# Altium PCB 2019-NUC029LAN.PcbDoc (part 2 of 2)
Units mil, origin at the board's own origin, x right, y up, seen from the top; angles counter-clockwise.
Board outline 3307.03 x 3019.03 mil, 2 copper layers (Top Layer, Bottom Layer); 66 components, 62 nets, 308 pads, 91 vias.
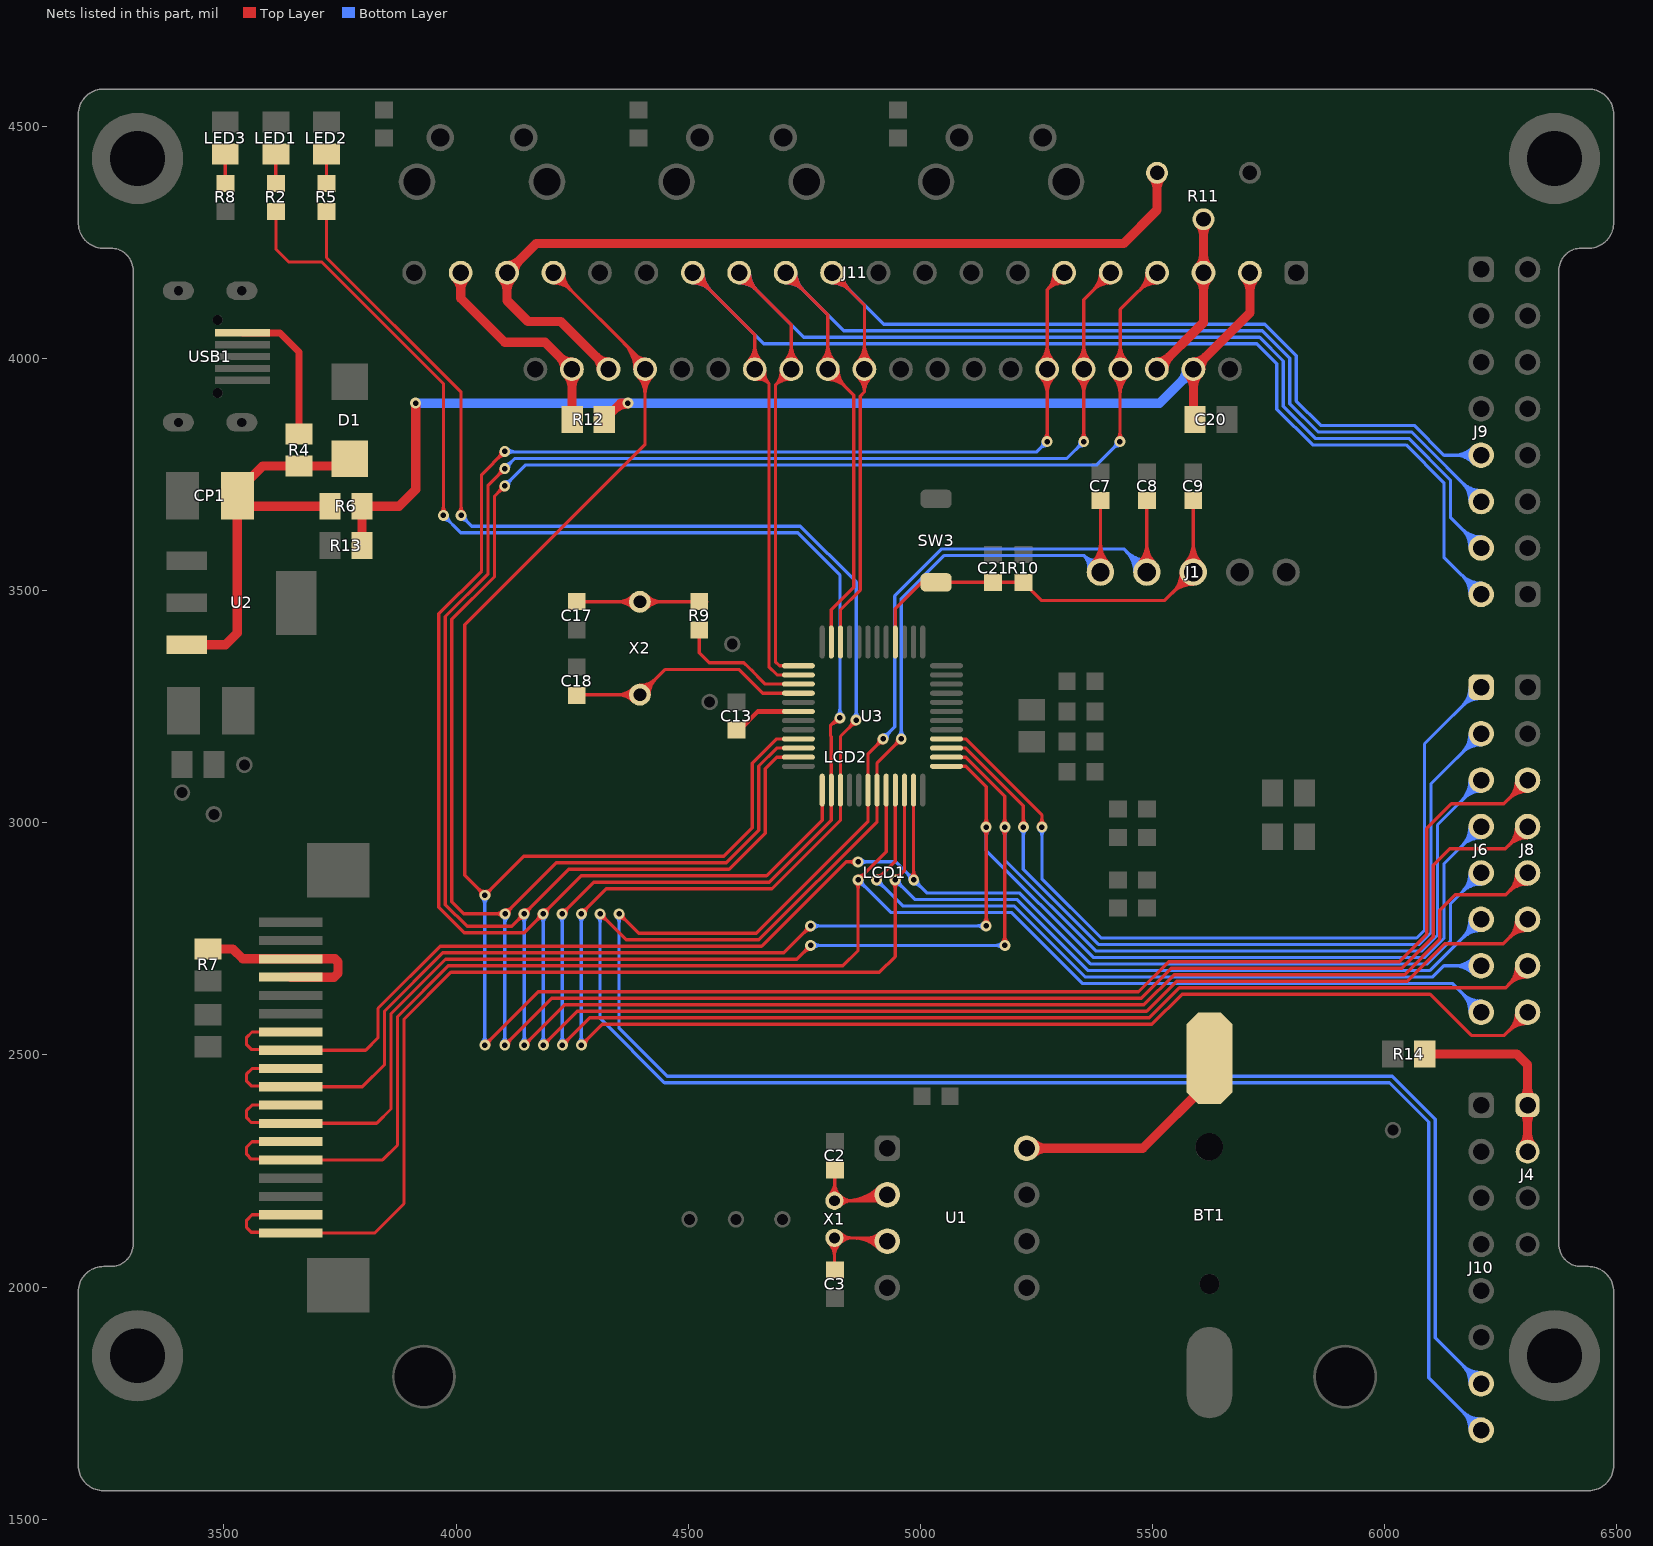
[diagram p2: the nets of this part, all layers, seen from the top]

## Via types
v1: diameter 23.62, hole 11.81, Top Layer to Bottom Layer, 91 vias

## Nets (pads, with @x,y where several pads share a name; then routed paths per layer and width w, separated by ;. In a path a pad name is that pad's centre, name@x,y a point inside that pad or via, vN(x,y) a via of type N, cw(c..) or ccw(c..) an arc to the next point about the centre after c; other vN are vias at no path point) (continued)
LCD-DB4: J9.5 J11.11 LCD1.11 U3.10 | length 3166.3
  Top Layer w7: J11.11@4810,4162.91 cw(c4810,4109.58) 4847.71,4147.29 cw(c4885.42,4185) J11.11@4832.09,4185 ; J11.11@4810,4169.91 cw(c4810,4133.48) 4835.76,4159.24 cw(c4861.52,4185) J11.11@4825.09,4185 ; J11.11@4810,4185 4879.64,4115.36 LCD1.11@4879.64,3977 4879.64,3928 ; U3.10@4828.1,3389.45 4828.1,3458.97 4870.53,3501.4 4870.53,3918.89 4879.64,3928 ; LCD1.11@4864.02,3992.62 ccw(c4826.31,4030.33) 4879.64,4030.33 ccw(c4932.97,4030.33) LCD1.11@4895.26,3992.62 ; LCD1.11@4865.01,3960.45 cw(c4836.34,3928) 4879.64,3928 ; LCD1.11@4868.97,3987.67 ccw(c4843.21,4013.43) 4879.64,4013.43 ccw(c4916.07,4013.43) LCD1.11@4890.31,3987.67 ; LCD1.11@4869.65,3965.69 cw(c4850.06,3943.53) 4879.64,3943.53 cw(c4909.21,3943.53) LCD1.11@4889.63,3965.69 ; LCD1.11@4894.27,3960.45 ccw(c4922.93,3928) 4879.64,3928
  Bottom Layer w7: J11.11@4810,4162.91 cw(c4810,4109.58) 4847.71,4147.29 cw(c4885.42,4185) J11.11@4832.09,4185 ; J11.11@4810,4169.91 cw(c4810,4133.48) 4835.76,4159.24 cw(c4861.52,4185) J11.11@4825.09,4185 ; J11.11@4810,4185 4921,4074 5742.4,4074 5810,4006.4 5810,3908.4 5862.4,3856 6063.8,3856 6127.8,3792 J9.5@6208,3792 ; J9.5@6190.99,3774.99 ccw(c6149.92,3733.92) 6149.92,3792 ccw(c6149.92,3850.08) J9.5@6190.99,3809.01 ; J9.5@6195.94,3779.94 ccw(c6166.82,3750.82) 6166.82,3792 ccw(c6166.82,3833.18) J9.5@6195.94,3804.06
LCD-DB5: J9.6 J11.12 LCD1.12 U3.11 | length 3355.7
  Top Layer w7: J11.12@4710,4162.91 cw(c4710,4109.58) 4747.71,4147.29 cw(c4785.42,4185) J11.12@4732.09,4185 ; J11.12@4710,4169.91 cw(c4710,4133.48) 4735.76,4159.24 cw(c4761.52,4185) J11.12@4725.09,4185 ; J11.12@4710,4185 4800.9,4094.1 LCD1.12@4800.9,3977 4856.53,3921.37 4856.53,3507.2 4808.42,3459.09 U3.11@4808.42,3389.45 ; LCD1.12@4785.28,3992.62 ccw(c4747.57,4030.33) 4800.9,4030.33 ccw(c4854.23,4030.33) LCD1.12@4816.52,3992.62 ; LCD1.12@4790.23,3987.67 ccw(c4764.47,4013.43) 4800.9,4013.43 ccw(c4837.33,4013.43) LCD1.12@4811.57,3987.67 ; LCD1.12@4800.9,3954.91 cw(c4800.9,3901.58) 4838.61,3939.29 cw(c4876.32,3977) LCD1.12@4822.99,3977 ; LCD1.12@4800.9,3961.91 cw(c4800.9,3925.48) 4826.66,3951.24 cw(c4852.42,3977) LCD1.12@4815.99,3977
  Bottom Layer w7: J11.12@4710,4162.91 cw(c4710,4109.58) 4747.71,4147.29 cw(c4785.42,4185) J11.12@4732.09,4185 ; J11.12@4710,4169.91 cw(c4710,4133.48) 4735.76,4159.24 cw(c4761.52,4185) J11.12@4725.09,4185 ; J11.12@4710,4185 4835,4060 5736.6,4060 5796,4000.6 5796,3902.6 5856.6,3842 6058,3842 J9.6@6208,3692 ; J9.6@6183.94,3692 ccw(c6125.86,3692) 6166.93,3733.07 ccw(c6208,3774.14) J9.6@6208,3716.06 ; J9.6@6190.94,3692 ccw(c6149.76,3692) 6178.88,3721.12 ccw(c6208,3750.24) J9.6@6208,3709.06
LCD-DB6: J9.7 J11.13 LCD1.13 U3.13 | length 3599.4
  Top Layer w7: J11.13@4610,4162.91 cw(c4610,4109.58) 4647.71,4147.29 cw(c4685.42,4185) J11.13@4632.09,4185 ; J11.13@4610,4169.91 cw(c4610,4133.48) 4635.76,4159.24 cw(c4661.52,4185) J11.13@4625.09,4185 ; J11.13@4610,4185 4722.17,4072.83 LCD1.13@4722.17,3977 4688,3942.83 ; LCD1.13@4700.13,3975.4 cw(c4658.45,3972.39) 4688,3942.84 ; LCD1.13@4706.55,3992.62 ccw(c4668.83,4030.33) 4722.17,4030.33 ccw(c4775.5,4030.33) LCD1.13@4737.79,3992.62 ; LCD1.13@4707.11,3975.91 cw(c4678.64,3973.85) 4698.83,3953.66 cw(c4719.01,3933.47) LCD1.13@4721.08,3961.95 ; LCD1.13@4711.5,3987.67 ccw(c4685.73,4013.43) 4722.17,4013.43 ccw(c4758.6,4013.43) LCD1.13@4732.84,3987.67 ; LCD1.13@4720.57,3954.97 ccw(c4717.55,3913.28) 4688,3942.84 ; U3.13@4737.55,3338.27 4696.73,3338.27 4688,3347 4688,3942.83
  Bottom Layer w7: J11.13@4610,4162.91 cw(c4610,4109.58) 4647.71,4147.29 cw(c4685.42,4185) J11.13@4632.09,4185 ; J11.13@4610,4169.91 cw(c4610,4133.48) 4635.76,4159.24 cw(c4661.52,4185) J11.13@4625.09,4185 ; J11.13@4610,4185 4749,4046 5730.8,4046 5782,3994.8 5782,3896.8 5850.8,3828 6052.2,3828 6141.79,3738.41 6141.79,3658.21 J9.7@6208,3592 ; J9.7@6183.94,3592 ccw(c6125.86,3592) 6166.93,3633.07 ccw(c6208,3674.14) J9.7@6208,3616.06 ; J9.7@6190.94,3592 ccw(c6149.76,3592) 6178.88,3621.12 ccw(c6208,3650.24) J9.7@6208,3609.06
LCD-DB7: J9.8 J11.14 LCD1.14 U3.14 | length 3802.5
  Top Layer w7: J11.14@4510,4162.91 cw(c4510,4109.58) 4547.71,4147.29 cw(c4585.42,4185) J11.14@4532.09,4185 ; J11.14@4510,4169.91 cw(c4510,4133.48) 4535.76,4159.24 cw(c4561.52,4185) J11.14@4525.09,4185 ; J11.14@4510,4185 4643.43,4051.57 LCD1.14@4643.43,3977 4674,3946.43 ; LCD1.14@4627.81,3992.62 ccw(c4590.1,4030.33) 4643.43,4030.33 ccw(c4696.76,4030.33) LCD1.14@4659.05,3992.62 ; LCD1.14@4632.76,3987.67 ccw(c4607,4013.43) 4643.43,4013.43 ccw(c4679.86,4013.43) LCD1.14@4654.1,3987.67 ; LCD1.14@4645.82,3962.1 cw(c4649.21,3941.02) 4664.31,3956.12 cw(c4679.41,3971.22) LCD1.14@4658.33,3974.61 ; LCD1.14@4646.94,3955.19 cw(c4651.9,3924.33) 4674,3946.43 ; LCD1.14@4665.24,3973.49 ccw(c4696.1,3968.53) 4674,3946.43 ; U3.14@4737.55,3318.58 4691.42,3318.58 4674,3336 4674,3946.43
  Bottom Layer w7: J11.14@4510,4162.91 cw(c4510,4109.58) 4547.71,4147.29 cw(c4585.42,4185) J11.14@4532.09,4185 ; J11.14@4510,4169.91 cw(c4510,4133.48) 4535.76,4159.24 cw(c4561.52,4185) J11.14@4525.09,4185 ; J11.14@4510,4185 4663,4032 5725,4032 5768,3989 5768,3891 5845,3814 6046.4,3814 6127.79,3732.61 6127.79,3572.21 J9.8@6208,3492 ; J9.8@6183.94,3492 ccw(c6125.86,3492) 6166.93,3533.07 ccw(c6208,3574.14) J9.8@6208,3516.06 ; J9.8@6190.94,3492 ccw(c6149.76,3492) 6178.88,3521.12 ccw(c6208,3550.24) J9.8@6208,3509.06
LCD-EN: J8.6 J11.6 LCD1.6 U3.25 | length 6982.9
  Top Layer w7: v1@4096.69,3800 cw(c4076.62,3800) 4090.81,3785.81 cw(c4105,3771.62) v1@4105,3791.69 ; v1(4105,3800) 4055,3750 4055,3542.2 3963,3450.2 3963,2818 4018,2763 4146.75,2763 v1(4187.75,2804) ; v1@4179.44,2804 cw(c4159.37,2804) 4173.56,2789.81 cw(c4187.75,2775.62) v1@4187.75,2795.69 ; v1@4187.75,2802.75 v1(4187.75,2804) ; v1@4187.75,2812.31 ccw(c4187.75,2832.38) 4201.94,2818.19 ccw(c4216.13,2804) v1@4196.06,2804 ; v1(4188,2521) 4261,2594 5487.4,2594 5552.4,2659 6048.99,2659 6129.78,2739.78 6255.78,2739.78 J8.6@6308,2792 ; v1@4188,2529.31 ccw(c4188,2549.38) 4202.19,2535.19 ccw(c4216.38,2521) v1@4196.31,2521 ; U3.25@4788.73,3070.55 4788.73,3005.73 4669,2886 4269.75,2886 v1(4187.75,2804) ; LCD1.6@5257.7,3961.38 cw(c5219.99,3923.67) 5273.32,3923.67 cw(c5326.65,3923.67) LCD1.6@5288.94,3961.38 ; LCD1.6@5257.7,3992.62 ccw(c5219.99,4030.33) 5273.32,4030.33 ccw(c5326.65,4030.33) LCD1.6@5288.94,3992.62 ; LCD1.6@5262.65,3966.33 cw(c5236.89,3940.57) 5273.32,3940.57 cw(c5309.75,3940.57) LCD1.6@5283.99,3966.33 ; LCD1.6@5262.65,3987.67 ccw(c5236.89,4013.43) 5273.32,4013.43 ccw(c5309.75,4013.43) LCD1.6@5283.99,3987.67 ; v1@5267.12,3826.88 ccw(c5252.17,3841.83) 5273.32,3841.83 ; v1@5273.32,3821.32 LCD1.6@5273.32,3977 5273.32,4148.32 ; 5273.32,3840.29 ccw(c5292.29,3840.29) v1@5278.88,3826.88 ; J11.6@5287.91,4184.56 cw(c5238.07,4183.57) 5273.32,4148.32 ; J11.6@5294.91,4184.7 cw(c5260.86,4184.03) 5284.94,4159.94 cw(c5309.03,4135.86) J11.6@5309.7,4169.91 ; J11.6@5309.56,4162.91 ccw(c5308.57,4113.07) 5273.32,4148.32 ; J11.6@5310,4185 5273.32,4148.32 ; J8.6@6283.94,2792 cw(c6225.86,2792) 6266.93,2750.93 cw(c6308,2709.86) J8.6@6308,2767.94 ; J8.6@6290.94,2792 cw(c6249.76,2792) 6278.88,2762.88 cw(c6308,2733.76) J8.6@6308,2774.94
  Bottom Layer w7: v1@4106,3799 5251,3799 v1(5273,3821) ; v1@4110.88,3794.12 cw(c4122.65,3782.35) 4122.65,3799 ; v1@4110.88,3805.88 ccw(c4127.48,3822.48) 4127.48,3799 ; v1@4181.87,2798.12 cw(c4167.69,2783.94) 4187.75,2783.94 cw(c4207.81,2783.94) v1@4193.63,2798.12 ; v1@4182.12,2526.88 ccw(c4168.54,2540.46) 4187.75,2540.46 ; v1@4187.75,2521 v1(4187.75,2804) ; 4187.75,2541.67 ccw(c4208.67,2541.67) v1@4193.88,2526.88 ; v1@5264.69,3821 cw(c5244.62,3821) 5258.81,3806.81 cw(c5273,3792.62) v1@5273,3812.69
LCD-LEDA: J11.19 LCD1.19 R12.1 | length 638.1
  Top Layer w20: J11.19@3998.98,4173.98 cw(c3972.36,4147.36) 4010,4147.36 cw(c4047.64,4147.36) J11.19@4021.02,4173.98 ; J11.19@4010,4185 4010,4130 4105,4035 4191.75,4035 LCD1.19@4249.75,3977 4249.75,3874.7 R12.1@4250,3874.45 ; LCD1.19@4234.16,3977 ccw(c4196.52,3977) 4223.13,4003.61 ccw(c4249.75,4030.23) LCD1.19@4249.75,3992.59 ; LCD1.19@4238.72,3965.98 cw(c4212.11,3939.36) 4249.75,3939.36 cw(c4287.39,3939.36) LCD1.19@4260.77,3965.98
LCD-REST: J8.3 J11.17 LCD1.17 U3.21 | length 6202.8
  Top Layer w7: v1@4053.69,2844 ccw(c4033.62,2844) 4047.81,2858.19 ccw(c4062,2872.38) 4062,2852.31 ccw(c4062,2872.38) 4076.19,2858.19 ccw(c4090.38,2844) v1@4070.31,2844 ; v1(4062,2521) 4177,2636 5470.01,2636 5535.01,2701 6031.6,2701 6091,2760.4 6091,2988 6144,3041 6257,3041 J8.3@6308,3092 ; v1@4062,2529.31 ccw(c4062,2549.38) 4076.19,2535.19 ccw(c4090.38,2521) v1@4070.31,2521 ; J11.17@4210,4162.91 cw(c4210,4109.58) 4247.71,4147.29 cw(c4285.42,4185) J11.17@4232.09,4185 ; J11.17@4210,4169.91 cw(c4210,4133.48) 4235.76,4159.24 cw(c4261.52,4185) J11.17@4225.09,4185 ; J11.17@4210,4185 LCD1.17@4407.22,3987.78 ; 4361.89,4033.11 cw(c4305.78,3977) LCD1.17@4385.13,3977 ; 4373.84,4021.16 cw(c4329.68,3977) LCD1.17@4392.13,3977 ; 4385.79,4009.21 cw(c4353.57,3977) LCD1.17@4399.13,3977 ; 4387.91,4007.09 ccw(c4407.22,4026.4) LCD1.17@4407.22,3999.09 ; LCD1.17@4391.6,3961.38 cw(c4353.89,3923.67) 4407.22,3923.67 cw(c4460.55,3923.67) LCD1.17@4422.84,3961.38 ; LCD1.17@4396.55,3966.33 cw(c4370.79,3940.57) 4407.22,3940.57 cw(c4443.65,3940.57) LCD1.17@4417.89,3966.33 ; LCD1.17@4407.22,3977 4407.22,3815.22 4019,3427 4019,2887 v1(4062,2844) 4146,2928 4576.6,2928 4638,2989.4 4638,3128.2 4690.59,3180.79 U3.21@4737.55,3180.79 ; J8.3@6283.94,3092 cw(c6225.86,3092) 6266.93,3050.93 cw(c6308,3009.86) J8.3@6308,3067.94 ; J8.3@6290.94,3092 cw(c6249.76,3092) 6278.88,3062.88 cw(c6308,3033.76) J8.3@6308,3074.94
  Bottom Layer w7: v1@4056.12,2526.88 ccw(c4041.94,2541.06) 4062,2541.06 ccw(c4082.06,2541.06) v1@4067.88,2526.88 ; v1@4056.12,2838.12 cw(c4041.94,2823.94) 4062,2823.94 cw(c4082.06,2823.94) v1@4067.88,2838.12 ; v1(4062,2521) 4062,2791 ; 4062,2804 4062,2791 ; v1(4062,2844) 4062,2791
LCD-RS: J8.4 J11.4 LCD1.4 U3.22 | length 7324.6
  Top Layer w7: v1@4096.69,3726 cw(c4076.62,3726) 4090.81,3711.81 cw(c4105,3697.62) v1@4105,3717.69 ; v1@4100.12,2798.12 ccw(c4085.94,2783.94) 4085.94,2804 ccw(c4085.94,2824.06) v1@4100.12,2809.88 ; v1@4105,2529.31 ccw(c4105,2549.38) 4119.19,2535.19 ccw(c4133.38,2521) v1@4113.31,2521 ; v1(4105,3726) 4083,3704 4083,3670 4083,3530.6 3991,3438.6 3991,2829.6 4016.6,2804 v1(4106,2804) 4216,2914 4582.4,2914 4652,2983.6 4652,3122.4 4690.7,3161.1 U3.22@4737.55,3161.1 ; v1@4106,2522 4206,2622 5475.8,2622 5540.8,2687 6037.4,2687 6105,2754.6 6105,2909 6140,2944 6260,2944 J8.4@6308,2992 ; v1@4106,2812.31 ccw(c4106,2832.38) 4120.19,2818.19 ccw(c4134.38,2804) v1@4114.31,2804 ; LCD1.4@5415.17,3961.38 cw(c5379.37,3925.58) 5430,3925.58 ; LCD1.4@5415.17,3992.62 ccw(c5377.46,4030.33) 5430.79,4030.33 ccw(c5484.12,4030.33) LCD1.4@5446.41,3992.62 ; LCD1.4@5420.12,3966.33 cw(c5396.27,3942.48) 5430,3942.48 ; LCD1.4@5420.12,3987.67 ccw(c5394.36,4013.43) 5430.79,4013.43 ccw(c5467.22,4013.43) LCD1.4@5441.46,3987.67 ; v1@5424.12,3826.88 ccw(c5409.94,3841.06) 5430,3841.06 ccw(c5450.06,3841.06) v1@5435.88,3826.88 ; v1(5430,3821) 5430,3976.21 LCD1.4@5430.79,3977 5430.79,4105.79 J11.4@5510,4185 ; 5430,3921.76 cw(c5486.03,3921.76) LCD1.4@5446.41,3961.38 ; 5430,3938.66 cw(c5469.13,3938.66) LCD1.4@5441.46,3966.33 ; J11.4@5487.91,4185 cw(c5434.58,4185) 5472.29,4147.29 cw(c5510,4109.58) J11.4@5510,4162.91 ; J11.4@5494.91,4185 cw(c5458.48,4185) 5484.24,4159.24 cw(c5510,4133.48) J11.4@5510,4169.91 ; J8.4@6283.94,2992 cw(c6225.86,2992) 6266.93,2950.93 cw(c6308,2909.86) J8.4@6308,2967.94 ; J8.4@6290.94,2992 cw(c6249.76,2992) 6278.88,2962.88 cw(c6308,2933.76) J8.4@6308,2974.94
  Bottom Layer w7: v1@4099.12,2526.88 ccw(c4084.94,2541.06) 4105,2541.06 ccw(c4125.06,2541.06) v1@4110.88,2526.88 ; v1@4100.12,2798.12 cw(c4088.35,2786.35) 4105,2786.35 ; v1(4105,2521) 4105,2803 v1(4106,2804) ; 4105,2781.52 cw(c4128.48,2781.52) v1@4111.88,2798.12 ; v1(4105,3726) 4150,3771 5380,3771 v1(5430,3821) ; v1@4105,3734.31 ccw(c4105,3754.38) 4119.19,3740.19 ccw(c4133.38,3726) v1@4113.31,3726 ; v1@5421.69,3821 cw(c5401.62,3821) 5415.81,3806.81 cw(c5430,3792.62) v1@5430,3812.69
LCD-RW: J8.5 J11.5 LCD1.5 U3.23 | length 7160.8
  Top Layer w7: v1@4096.69,3763 cw(c4076.62,3763) 4090.81,3748.81 cw(c4105,3734.62) v1@4105,3754.69 ; v1(4105,3763) 4069,3727 4069,3536.4 3977,3444.4 3977,2823.8 4023.8,2777 4119.87,2777 v1(4146.87,2804) 4242.87,2900 4588.2,2900 4666,2977.8 4666,3116.6 4690.81,3141.42 U3.23@4737.55,3141.42 ; v1@4138.56,2804 cw(c4118.5,2804) 4132.69,2789.81 cw(c4146.87,2775.62) v1@4146.87,2795.69 ; v1@4146.87,2812.31 ccw(c4146.87,2832.38) 4161.06,2818.19 ccw(c4175.25,2804) v1@4155.19,2804 ; v1(4147,2521) 4234,2608 5481.6,2608 5546.6,2673 6043.2,2673 6119,2748.8 6119,2812 6152,2845 6261,2845 J8.5@6308,2892 ; v1@4147,2529.31 ccw(c4147,2549.38) 4161.19,2535.19 ccw(c4175.38,2521) v1@4155.31,2521 ; LCD1.5@5336.43,3961.38 cw(c5298.72,3923.67) 5352.06,3923.67 cw(c5405.39,3923.67) LCD1.5@5367.68,3961.38 ; LCD1.5@5336.43,3992.62 ccw(c5298.72,4030.33) 5352.06,4030.33 ccw(c5405.39,4030.33) LCD1.5@5367.68,3992.62 ; LCD1.5@5341.38,3966.33 cw(c5315.62,3940.57) 5352.06,3940.57 cw(c5388.49,3940.57) LCD1.5@5362.73,3966.33 ; LCD1.5@5341.38,3987.67 ccw(c5315.62,4013.43) 5352.06,4013.43 ccw(c5388.49,4013.43) LCD1.5@5362.73,3987.67 ; v1@5346.18,3826.88 ccw(c5331.99,3841.06) 5352.06,3841.06 ccw(c5372.12,3841.06) v1@5357.93,3826.88 ; v1(5352.06,3821) LCD1.5@5352.06,3977 5352.06,4127.06 J11.5@5410,4185 ; J11.5@5387.91,4185 cw(c5334.58,4185) 5372.29,4147.29 cw(c5410,4109.58) J11.5@5410,4162.91 ; J11.5@5394.91,4185 cw(c5358.48,4185) 5384.24,4159.24 cw(c5410,4133.48) J11.5@5410,4169.91 ; J8.5@6283.94,2892 cw(c6225.86,2892) 6266.93,2850.93 cw(c6308,2809.86) J8.5@6308,2867.94 ; J8.5@6290.94,2892 cw(c6249.76,2892) 6278.88,2862.88 cw(c6308,2833.76) J8.5@6308,2874.94
  Bottom Layer w7: v1(4105,3763) 4127,3785 5316.06,3785 v1(5352.06,3821) ; v1@4105,3771.31 ccw(c4105,3791.38) 4119.19,3777.19 ccw(c4133.38,3763) v1@4113.31,3763 ; v1@4141,2798.12 cw(c4126.81,2783.94) 4146.87,2783.94 cw(c4166.94,2783.94) v1@4152.75,2798.12 ; v1@4141.12,2526.88 ccw(c4127.24,2540.76) 4146.87,2540.76 ; v1@4146.87,2521 v1(4146.87,2804) ; 4146.87,2541.37 ccw(c4167.37,2541.37) v1@4152.88,2526.88 ; v1@5343.74,3821 cw(c5323.68,3821) 5337.87,3806.81 cw(c5352.06,3792.62) v1@5352.06,3812.69
LCD-VIN: J11.3 LCD1.3 R11.3 | length 596.5
  Top Layer w20: LCD1.3@5509.53,3977 5610.01,4077.48 R11.3@5610.01,4298.01 ; LCD1.3@5509.53,3992.59 ccw(c5509.53,4030.23) 5536.14,4003.61 ccw(c5562.76,3977) LCD1.3@5525.12,3977 ; J11.3@5598.98,4173.98 cw(c5572.36,4147.36) 5610,4147.36 cw(c5647.64,4147.36) J11.3@5621.02,4173.98 ; J11.3@5598.98,4196.02 ccw(c5572.36,4222.64) 5610,4222.64 ccw(c5647.64,4222.64) J11.3@5621.02,4196.02 ; R11.3@5600.38,4290.38 cw(c5577.12,4267.12) 5610.01,4267.12 cw(c5642.89,4267.12) R11.3@5619.64,4290.38 ; R11.3@5610.01,4300.01 R11.3@5610.01,4298.01 ; R11.3@5612.01,4300.01 R11.3@5610.01,4298.01
LCD-VOUT: J11.18 LCD1.18 R11.2 | length 2125.7
  Top Layer w10: LCD1.18@4318,3977 LCD1.18@4328.48,3977
  Top Layer w20: J11.18@4098.98,4173.98 cw(c4072.36,4147.36) 4110,4147.36 cw(c4147.64,4147.36) J11.18@4121.02,4173.98 ; J11.18@4110,4200.59 ccw(c4110,4238.23) 4136.61,4211.61 ccw(c4163.23,4185) J11.18@4125.59,4185 ; J11.18@4120.48,4185 J11.18@4110,4185 ; LCD1.18@4312.89,3977 ccw(c4275.26,3977) 4301.87,4003.61 ccw(c4328.48,4030.23) LCD1.18@4328.48,3992.59 ; LCD1.18@4328.48,3977 4249.24,4056.24 4225.48,4080 4155,4080 4110,4125 J11.18@4110,4185 ; R11.2@5500.38,4390.38 cw(c5477.12,4367.12) 5510.01,4367.12 cw(c5542.89,4367.12) R11.2@5519.64,4390.38 ; R11.2@5510.01,4400.01 5510.01,4320.01 5438,4248 4859,4248 4173,4248 J11.18@4110,4185
LED-1: J8.7 R2.1 U3.26 | length 5792.3
  Top Layer w7: R2.1@3612.06,4316.69 3612.06,4235.94 3640,4208 3710.8,4208 3973,3945.8 v1(3973,3662) ; v1@3967.12,3667.88 ccw(c3952.94,3682.06) 3973,3682.06 ccw(c3993.06,3682.06) v1@3978.88,3667.88 ; v1(4228.62,2804) 4296.62,2872 4674.8,2872 4808.42,3005.62 U3.26@4808.42,3070.55 4808.42,3186 4806.42,3188 4806.42,3209.42 ; v1@4228.62,2812.31 ccw(c4228.62,2832.38) 4242.81,2818.19 ccw(c4257,2804) v1@4236.94,2804 ; v1(4229,2521) 4288,2580 5493.2,2580 5558.2,2645 6261,2645 J8.7@6308,2692 ; v1@4229,2529.31 ccw(c4229,2549.38) 4243.19,2535.19 ccw(c4257.38,2521) v1@4237.31,2521 ; 4815.64,3218.64 ccw(c4808.28,3226) v1@4818.69,3226 ; v1@4823,3226 4806.42,3209.42 ; v1@4826.86,3217.69 ccw(c4826.4,3189.44) 4806.42,3209.42 ; J8.7@6283.94,2692 cw(c6225.86,2692) 6266.93,2650.93 cw(c6308,2609.86) J8.7@6308,2667.94 ; J8.7@6290.94,2692 cw(c6249.76,2692) 6278.88,2662.88 cw(c6308,2633.76) J8.7@6308,2674.94
  Bottom Layer w7: v1@3973,3653.69 cw(c3973,3633.62) 3987.19,3647.81 cw(c4001.38,3662) v1@3981.31,3662 ; v1(3973,3662) 4010,3625 4736,3625 4827,3534 v1(4827,3226) ; v1@4222.75,2798.12 cw(c4208.56,2783.94) 4228.62,2783.94 cw(c4248.69,2783.94) v1@4234.5,2798.12 ; v1@4223.12,2526.88 ccw(c4209.84,2540.16) 4228.62,2540.16 ; v1@4228.62,2521 v1(4228.62,2804) ; 4228.62,2541.97 ccw(c4249.97,2541.97) v1@4234.88,2526.88 ; v1@4821.12,3231.88 ccw(c4806.94,3246.06) 4827,3246.06 ccw(c4847.06,3246.06) v1@4832.88,3231.88
LED-2: J8.8 R5.1 U3.27 | length 5825.7
  Top Layer w7: R5.1@3721,4316.69 3721,4217.6 4011,3927.6 v1(4011,3662) ; v1@4005.12,3667.88 ccw(c3990.94,3682.06) 4011,3682.06 ccw(c4031.06,3682.06) v1@4016.88,3667.88 ; v1@4269.5,2804 4323.5,2858 4680.6,2858 4828.1,3005.5 U3.27@4828.1,3070.55 4828.1,3186.1 v1@4862,3220 ; v1(4270,2521) 4315,2566 4362,2566 4373,2566 ; v1@4270,2529.31 ccw(c4270,2549.38) 4284.19,2535.19 ccw(c4298.38,2521) v1@4278.31,2521 ; v1@4270,2812.31 ccw(c4270,2831.17) 4283.33,2817.83 ; v1@4278.31,2804 cw(c4299.58,2804) 4284.54,2819.04 ; 4410,2566 4373,2566 ; 4484,2566 4587,2566 ; 4847.11,3205.11 ccw(c4831.21,3221) v1@4853.69,3221 ; 4849.52,3207.52 cw(c4862,3195.04) v1@4862,3212.69 ; J8.8@6283.94,2592 cw(c6225.86,2592) 6266.93,2550.93 cw(c6308,2509.86) J8.8@6308,2567.94 ; J8.8@6290.94,2592 cw(c6249.76,2592) 6278.88,2562.88 cw(c6308,2533.76) J8.8@6308,2574.94 ; J8.8@6308,2592 6258,2542 6187,2542 6098,2631 5564,2631 5499,2566 4587,2566 ; 4373,2566 4587,2566
  Bottom Layer w7: v1@4011,3653.69 cw(c4011,3633.62) 4025.19,3647.81 cw(c4039.38,3662) v1@4019.31,3662 ; v1(4011,3662) 4034,3639 4741.8,3639 4862,3518.8 v1(4862,3221) ; v1@4264.12,2526.88 ccw(c4251.14,2539.86) 4269.5,2539.86 ; v1@4264.12,2798.12 cw(c4251.14,2785.14) 4269.5,2785.14 ; v1@4269.5,2521 v1@4269.5,2804 ; 4269.5,2542.27 ccw(c4291.27,2542.27) v1@4275.88,2526.88 ; 4269.5,2782.73 cw(c4291.27,2782.73) v1@4275.88,2798.12 ; v1@4856.12,3226.88 ccw(c4841.94,3241.06) 4862,3241.06 ccw(c4882.06,3241.06) v1@4867.88,3226.88
  other v1: 4270,2804
LEDA: LCD2.15 LCD2.16 R7.2 | length 429.7
  Top Layer w20: R7.2@3466,2728.45 3519,2728.45 3540.44,2707.01 LCD2.16@3644.04,2707.01 3739.26,2707.01 3746,2700.26 ; LCD2.15@3644.04,2667.64 3737.38,2667.64 3746,2676.26 3746,2700.26 ; 3740,2706.26 3746,2700.26
LVCC: C20.2 J11.2 LCD1.2 R6.1 R12.2 R13.1 | length 2818.9
  Top Layer w20: R6.1@3787.45,3682 R6.1@3797.45,3682 ; R13.1@3797.45,3597 R6.1@3797.45,3682 ; v1(3913,3904) 3913,3774 3913,3718 3877,3682 R6.1@3797.45,3682 ; R12.2@4319.45,3868.35 4355.1,3904 v1(4370,3904) ; R12.2@4341.48,3890.37 cw(c4370,3861.85) v1@4370,3902.19 ; LCD1.2@5577.24,3965.98 cw(c5550.62,3939.36) 5588.26,3939.36 cw(c5625.9,3939.36) LCD1.2@5599.29,3965.98 ; LCD1.2@5588.26,3992.59 ccw(c5588.26,4030.23) 5614.88,4003.61 ccw(c5641.49,3977) LCD1.2@5603.85,3977 ; C20.2@5591.55,3868.35 5588.26,3871.63 LCD1.2@5588.26,3977 5710,4098.74 J11.2@5710,4185 ; J11.2@5698.98,4173.98 cw(c5672.36,4147.36) 5710,4147.36 cw(c5747.64,4147.36) J11.2@5721.02,4173.98
  Bottom Layer w20: v1(3913,3904) 3988,3904 v1(4370,3904) 5515.26,3904 LCD1.2@5588.26,3977 ; LCD1.2@5572.67,3977 cw(c5535.03,3977) 5561.65,3950.39 cw(c5588.26,3923.77) LCD1.2@5588.26,3961.41
NetBT1_1: BT1.1 U1.8 | length 570.2
  Top Layer w20: U1.8@5229,2299 5343,2299 5479,2299 5623,2443 BT1.1@5623,2493 ; U1.8@5241.42,2286.58 cw(c5271.39,2256.61) 5271.39,2299 cw(c5271.39,2341.39) U1.8@5241.42,2311.42
NetC2_2: C2.2 U1.2 X1.1 | length 631.9
  Top Layer w7: X1.1@4803.56,2197.44 ccw(c4773.51,2227.49) 4816,2227.49 ; X1.1@4808.51,2192.49 ccw(c4790.41,2210.59) 4816,2210.59 ; 4816,2205.76 ccw(c4834.76,2205.76) 4821.49,2192.49 ccw(c4837.17,2208.17) 4837.17,2186 ccw(c4837.17,2163.83) X1.1@4821.49,2179.51 ; 4816,2222.66 ccw(c4851.66,2222.66) 4826.44,2197.44 ccw(c4854.07,2225.07) 4854.07,2186 ccw(c4854.07,2146.93) X1.1@4826.44,2174.56 ; C2.2@4816,2252.68 4816,2187 X1.1@4815,2186 4916,2186 U1.2@4929,2199 ; 4839.53,2186 ccw(c4839.53,2288.47) U1.2@4911.99,2216.01 ; 4856.43,2186 ccw(c4856.43,2271.57) U1.2@4916.94,2211.06 ; 4873.33,2186 ccw(c4873.33,2254.67) U1.2@4921.89,2206.11 ; 4890.23,2186 ccw(c4890.23,2237.77) U1.2@4926.84,2201.16 ; 4902.3,2186 cw(c4902.3,2172.3) U1.2@4911.99,2181.99
NetC3_2: C3.2 U1.3 X1.2 | length 559.6
  Top Layer w7: X1.2@4803.56,2094.56 cw(c4775.93,2066.93) 4815,2066.93 cw(c4854.07,2066.93) 4826.44,2094.56 cw(c4854.07,2066.93) 4854.07,2106 cw(c4854.07,2145.07) X1.2@4826.44,2117.44 ; X1.2@4808.51,2099.51 cw(c4792.83,2083.83) 4815,2083.83 cw(c4837.17,2083.83) 4821.49,2099.51 cw(c4837.17,2083.83) 4837.17,2106 cw(c4837.17,2128.17) X1.2@4821.49,2112.49 ; C3.2@4816,2036.32 4815,2037.32 X1.2@4815,2106 4922,2106 U1.3@4929,2099 ; 4854.02,2106 cw(c4854.02,2024.02) U1.3@4911.99,2081.99 ; 4870.92,2106 cw(c4870.92,2040.92) U1.3@4916.94,2086.94 ; U1.3@4911.99,2116.01 cw(c4887.82,2140.18) 4887.82,2106 cw(c4887.82,2057.82) U1.3@4921.89,2091.89
NetC17_1: C17.1 R9.2 X2.1 | length 541.4
  Top Layer w7: C17.1@4251,3476.32 4251.31,3476 X2.1@4396,3476 4539.69,3476 R9.2@4540,3476.32 ; X2.1@4381.77,3461.77 ccw(c4347.42,3427.42) 4347.42,3476 ccw(c4347.42,3524.58) X2.1@4381.77,3490.23 ; X2.1@4386.72,3466.72 ccw(c4364.32,3444.32) 4364.32,3476 ccw(c4364.32,3507.68) X2.1@4386.72,3485.28 ; X2.1@4405.28,3466.72 cw(c4427.68,3444.32) 4427.68,3476 cw(c4427.68,3507.68) X2.1@4405.28,3485.28 ; X2.1@4410.23,3461.77 cw(c4444.58,3427.42) 4444.58,3476 cw(c4444.58,3524.58) X2.1@4410.23,3490.23
NetJ4_1: J4.1 J4.2 R14.1 | length 595.4
  Top Layer w20: R14.1@6086.45,2502 6150,2502 6285,2502 6308,2479 J4.1@6308,2392 6308,2336 J4.2@6308,2292 ; J4.2@6296.98,2303.02 ccw(c6270.36,2329.64) 6308,2329.64 ccw(c6345.64,2329.64) J4.2@6319.02,2303.02 ; J4.1@6296.98,2380.98 cw(c6270.36,2354.36) 6308,2354.36 cw(c6345.64,2354.36) J4.1@6319.02,2380.98 ; J4.1@6296.98,2403.02 ccw(c6270.36,2429.64) 6308,2429.64 ccw(c6345.64,2429.64) J4.1@6319.02,2403.02
NetLED1_A: LED1.A R2.2 | length 63.3
  Top Layer w7: LED1.A@3612,4440.55 3612,4377.38 R2.2@3612.06,4377.31
NetLED2_A: LED2.A R5.2 | length 63.2
  Top Layer w7: R5.2@3721,4377.31 LED2.A@3721,4440.55
NetLED3_A: LED3.A R8.1 | length 63.3
  Top Layer w7: LED3.A@3503,4440.55 3503,4377.44 R8.1@3503.13,4377.31
P06: J6.7 U3.33 | length 1830.7
  Top Layer w7: v1(4905.99,2877) 4946.21,2917.23 U3.33@4946.21,3070.55 ; v1@4905.99,2885.31 ccw(c4905.99,2905.38) 4920.17,2891.19 ccw(c4934.36,2877) v1@4914.3,2877
  Bottom Layer w7: v1@4905.99,2868.69 cw(c4905.99,2848.62) 4920.17,2862.81 cw(c4934.36,2877) v1@4914.3,2877 ; v1(4905.99,2877) 4961.99,2821 5201.8,2821 5354.8,2668 6103.8,2668 6127.8,2692 J6.7@6208,2692 J6.7@6205.9,2694.1 ; J6.7@6190.99,2674.99 ccw(c6149.92,2633.92) 6149.92,2692 ccw(c6149.92,2750.08) J6.7@6190.99,2709.01 ; J6.7@6195.94,2679.94 ccw(c6166.82,2650.82) 6166.82,2692 ccw(c6166.82,2733.18) J6.7@6195.94,2704.06
TICECLK: C7.2 J1.1 J10.8 U3.31 | length 5260.2
  Top Layer w7: v1@4310.37,2795.69 cw(c4310.37,2775.62) 4324.56,2789.81 cw(c4338.75,2804) v1@4318.69,2804 ; v1(4310.37,2804) 4366.37,2748 4652.4,2748 4906.84,3002.45 U3.31@4906.84,3070.55 4907,3070.71 4907,3129 v1(4959,3181) ; v1@4950.69,3181 cw(c4930.62,3181) 4944.81,3166.81 cw(c4959,3152.62) v1@4959,3172.69 ; J1.1@5369.6,3558.4 ccw(c5325.16,3602.84) 5388,3602.84 ccw(c5450.84,3602.84) J1.1@5406.4,3558.4 ; J1.1@5374.55,3553.45 ccw(c5342.06,3585.94) 5388,3585.94 ccw(c5433.94,3585.94) J1.1@5401.45,3553.45 ; J1.1@5381,3547 J1.1@5388,3540 C7.2@5388,3694.68
  Bottom Layer w7: v1@4304.5,2798.12 cw(c4290.31,2783.94) 4310.37,2783.94 cw(c4330.44,2783.94) v1@4316.25,2798.12 ; v1(4310.37,2804) 4310.37,2578.63 4449,2440 6010.6,2440 6095,2355.6 6095,1805 J10.8@6208,1692 ; v1@4953.12,3186.88 ccw(c4938.94,3201.06) 4959,3201.06 ccw(c4979.06,3201.06) v1@4964.88,3186.88 ; v1(4959,3181) 4959,3483 5052,3576 5352,3576 ; J1.1@5362.3,3544.14 ccw(c5326,3549.99) 5352,3576 ; J1.1@5369.21,3543.03 ccw(c5342.67,3547.31) 5361.68,3566.32 ccw(c5380.69,3585.33) J1.1@5384.97,3558.79 ; J1.1@5383.86,3565.7 cw(c5378.01,3602) 5352,3576 ; J1.1@5388,3540 5352,3576 ; J10.8@6183.94,1692 ccw(c6125.86,1692) 6166.93,1733.07 ccw(c6208,1774.14) J10.8@6208,1716.06 ; J10.8@6190.94,1692 ccw(c6149.76,1692) 6178.88,1721.12 ccw(c6208,1750.24) J10.8@6208,1709.06
TICEDAT: C8.2 J1.2 J10.7 U3.30 | length 5537
  Top Layer w7: v1@4351.25,2795.69 cw(c4351.25,2775.62) 4365.44,2789.81 cw(c4379.62,2804) v1@4359.56,2804 ; v1(4351.25,2804) 4393.25,2762 4490,2762 4646.6,2762 4887.16,3002.56 U3.30@4887.16,3070.55 4887.16,3148.16 v1(4920,3181) ; v1@4911.69,3181 cw(c4891.62,3181) 4905.81,3166.81 cw(c4920,3152.62) v1@4920,3172.69 ; v1@4920,3180 4922,3180 v1@4921.5,3179.5 ; 5488,3659.18 J1.2@5488,3540 5488,3694.18 C8.2@5488.5,3694.68 ; 5488,3585.94 cw(c5442.06,3585.94) 5474.55,3553.45 ccw(c5442.06,3585.94) 5488,3585.94 ; 5488,3585.94 ccw(c5533.94,3585.94) 5501.45,3553.45 cw(c5533.94,3585.94) 5488,3585.94 ; 5488,3602.84 cw(c5425.16,3602.84) 5469.6,3558.4 ccw(c5425.16,3602.84) 5488,3602.84 ; 5488,3602.84 ccw(c5550.84,3602.84) 5506.4,3558.4 cw(c5550.84,3602.84) 5488,3602.84
  Bottom Layer w7: v1@4345.37,2798.12 cw(c4331.18,2783.94) 4351.25,2783.94 cw(c4371.31,2783.94) v1@4357.13,2798.12 ; v1(4351.25,2804) 4351.25,2557.55 4454.8,2454 6016.4,2454 6109,2361.4 6109,1891 J10.7@6208,1792 ; v1@4920,3180 v1(4920,3181) 4920,3182 4945,3207 4945,3488.8 5046.2,3590 5438,3590 J1.2@5488,3540 ; v1@4920,3189.31 ccw(c4920,3206.96) 4932.48,3194.48 ; v1@4928.31,3181 cw(c4950.79,3181) 4934.89,3196.89 ; J1.2@5461.97,3540 ccw(c5399.14,3540) 5443.57,3584.43 ccw(c5488,3628.86) J1.2@5488,3566.03 ; J1.2@5468.97,3540 ccw(c5423.04,3540) 5455.52,3572.48 ccw(c5488,3604.96) J1.2@5488,3559.03 ; J10.7@6183.94,1792 ccw(c6125.86,1792) 6166.93,1833.07 ccw(c6208,1874.14) J10.7@6208,1816.06 ; J10.7@6190.94,1792 ccw(c6149.76,1792) 6178.88,1821.12 ccw(c6208,1850.24) J10.7@6208,1809.06
TICERST: C9.2 C21.1 J1.3 R10.2 SW3.2 U3.4 | length 1620.1
  Top Layer w7: U3.4@4946.21,3389.45 4946.21,3461.21 5003,3518 5084,3518 ; SW3.2@5004,3518 SW3.2@5034,3518 R10.2@5216.31,3518 ; R10.2@5219.31,3515 R10.2@5216.31,3518 ; R10.2@5220,3521.68 R10.2@5216.31,3518 ; R10.2@5222,3517.68 5260.69,3479 5527,3479 J1.3@5588,3540 ; J1.3@5561.97,3540 cw(c5499.14,3540) 5543.57,3495.57 cw(c5588,3451.14) J1.3@5588,3513.97 ; J1.3@5568.97,3540 cw(c5523.04,3540) 5555.52,3507.52 cw(c5588,3475.04) J1.3@5588,3520.97 ; 5588,3630.68 J1.3@5588,3540 ; C9.2@5588,3694.68 J1.3@5588,3540 ; 5588,3585.94 cw(c5542.06,3585.94) 5574.55,3553.45 ccw(c5542.06,3585.94) 5588,3585.94 ; 5588,3585.94 ccw(c5633.94,3585.94) 5601.45,3553.45 cw(c5633.94,3585.94) 5588,3585.94 ; 5588,3602.84 cw(c5525.16,3602.84) 5569.6,3558.4 ccw(c5525.16,3602.84) 5588,3602.84 ; 5588,3602.84 ccw(c5650.84,3602.84) 5606.4,3558.4 cw(c5650.84,3602.84) 5588,3602.84
UC-CS: J6.5 LCD2.11 LCD2.12 U3.35 | length 3717.9
  Top Layer w7: LCD2.12@3644.04,2549.53 3560.53,2549.53 3549,2538 3549,2522 3559,2512 3642.19,2512 LCD2.11@3644.04,2510.16 3805.16,2510.16 3832,2537 3832,2600.2 3965.8,2734 4658.2,2734 4840.2,2916 v1(4866,2916) ; v1@4860.12,2910.12 ccw(c4845.94,2895.94) 4845.94,2916 ccw(c4845.94,2936.06) v1@4860.12,2921.88 ; v1@4980.08,2882.88 ccw(c4966.79,2896.16) 4985.58,2896.16 ; v1@4985,2876.04 v1(4985.96,2877) ; v1@4985.58,2879.63 U3.35@4985.58,3070.55 ; 4985.58,2897.97 ccw(c5006.92,2897.97) v1@4991.83,2882.88
  Bottom Layer w7: v1(4866,2916) 4946.96,2916 v1(4985.96,2877) ; v1@4871.88,2910.12 cw(c4886.06,2895.94) 4886.06,2916 cw(c4886.06,2936.06) v1@4871.88,2921.88 ; v1@4977.65,2877 ccw(c4957.58,2877) 4971.77,2891.19 ccw(c4985.96,2905.38) v1@4985.96,2885.31 ; v1@4985.96,2868.69 cw(c4985.96,2848.62) 5000.14,2862.81 cw(c5014.33,2877) v1@4994.27,2877 ; v1(4985.96,2877) v1(4985.96,2877) ; v1@4988,2874.96 v1(4985.96,2877) ; J6.5@6183.94,2892 cw(c6125.86,2892) 6166.93,2850.93 cw(c6208,2809.86) J6.5@6208,2867.94 ; J6.5@6190.94,2892 cw(c6149.76,2892) 6178.88,2862.88 cw(c6208,2833.76) J6.5@6208,2874.94 ; J6.5@6203,2892 J6.5@6208,2892 6142,2826 6142,2745.8 6092.2,2696 5366.4,2696 5213.4,2849 5013.96,2849 v1(4985.96,2877)
UC-RS: J6.4 LCD2.9 LCD2.10 U3.37 | length 4127.8
  Top Layer w7: LCD2.10@3644.04,2470.78 3560.53,2470.78 3549,2459.26 3549,2443.26 3559,2433.26 3642.19,2433.26 LCD2.9@3644.04,2431.41 3798.41,2431.41 3846,2479 3846,2594.4 3971.6,2720 4706,2720 v1(4764,2778) ; v1@4755.69,2778 cw(c4735.62,2778) 4749.81,2763.81 cw(c4764,2749.62) v1@4764,2769.69 ; U3.37@5056.45,3121.73 5097.87,3121.73 5142,3077.6 v1(5142,2991) v1(5142,2778) ; v1@5136.12,2783.88 ccw(c5121.94,2798.06) 5142,2798.06 ccw(c5162.06,2798.06) v1@5147.88,2783.88 ; v1@5136.12,2985.12 cw(c5121.94,2970.94) 5142,2970.94 cw(c5162.06,2970.94) v1@5147.88,2985.12 ; v1@5136.12,2996.88 ccw(c5121.94,3011.06) 5142,3011.06 ccw(c5162.06,3011.06) v1@5147.88,2996.88
  Bottom Layer w7: v1(4764,2778) v1(5142,2778) ; v1@4769.88,2772.12 cw(c4784.06,2757.94) 4784.06,2778 cw(c4784.06,2798.06) v1@4769.88,2783.88 ; v1@5136.12,2772.12 ccw(c5121.94,2757.94) 5121.94,2778 ccw(c5121.94,2798.06) v1@5136.12,2783.88 ; v1@5136.12,2985.12 cw(c5121.94,2970.94) 5142,2970.94 cw(c5162.06,2970.94) v1@5147.88,2985.12 ; v1(5142,2991) 5142,2940.2 5372.2,2710 6086.4,2710 6128,2751.6 6128,2912 J6.4@6208,2992 ; J6.4@6183.94,2992 cw(c6125.86,2992) 6166.93,2950.93 cw(c6208,2909.86) J6.4@6208,2967.94 ; J6.4@6190.94,2992 cw(c6149.76,2992) 6178.88,2962.88 cw(c6208,2933.76) J6.4@6208,2974.94
UC-RST: J6.3 LCD2.7 LCD2.8 U3.38 | length 4447.4
  Top Layer w7: LCD2.8@3644.04,2392.05 3560.53,2392.05 3549,2380.52 3549,2364.52 3559,2354.52 3642.19,2354.52 LCD2.7@3644.04,2352.68 3829,2352.68 3860,2383.68 3860,2588.6 3977.4,2706 4734,2706 v1(4764,2736) ; v1@4755.69,2736 cw(c4735.62,2736) 4749.81,2721.81 cw(c4764,2707.62) v1@4764,2727.69 ; U3.38@5056.45,3141.42 5097.98,3141.42 5182,3057.4 v1(5182,2991) v1(5182,2736) ; v1@5176.12,2741.88 ccw(c5161.94,2756.06) 5182,2756.06 ccw(c5202.06,2756.06) v1@5187.88,2741.88 ; v1@5176.12,2985.12 cw(c5161.94,2970.94) 5182,2970.94 cw(c5202.06,2970.94) v1@5187.88,2985.12 ; v1@5176.12,2996.88 ccw(c5161.94,3011.06) 5182,3011.06 ccw(c5202.06,3011.06) v1@5187.88,2996.88
  Bottom Layer w7: v1(4764,2736) 4898,2736 ; v1@4769.88,2730.12 cw(c4784.06,2715.94) 4784.06,2736 cw(c4784.06,2756.06) v1@4769.88,2741.88 ; 4837,2736 4898,2736 ; v1@5176.12,2730.12 ccw(c5161.94,2715.94) 5161.94,2736 ccw(c5161.94,2756.06) v1@5176.12,2741.88 ; v1@5176.12,2985.12 cw(c5161.94,2970.94) 5182,2970.94 cw(c5202.06,2970.94) v1@5187.88,2985.12 ; v1(5182,2736) 4898,2736 ; v1(5182,2991) 5182,2919.99 5377.99,2724 6080.6,2724 6114,2757.4 6114,2995.4 6208,3089.4 J6.3@6208,3092 ; 6165.09,3046.49 ccw(c6119.59,3092) J6.3@6183.94,3092 ; 6171.36,3052.77 cw(c6208,3016.13) J6.3@6208,3067.94 ; 6177.04,3058.44 ccw(c6143.49,3092) J6.3@6190.94,3092 ; 6183.31,3064.72 cw(c6208,3040.03) J6.3@6208,3074.94 ; 6188.99,3070.39 ccw(c6167.38,3092) J6.3@6197.94,3092
UC-SCL: J6.8 LCD2.5 LCD2.6 U3.32 | length 3867.9
  Top Layer w7: LCD2.6@3644.04,2313.3 3560.53,2313.3 3549,2301.78 3549,2285.78 3559,2275.78 3642.19,2275.78 LCD2.5@3644.04,2273.93 3841.93,2273.93 3874,2306 3874,2582.8 3983.2,2692 4833,2692 4866,2725 v1(4866,2877) 4926.53,2937.53 U3.32@4926.53,3070.55 ; v1@4860.12,2871.12 cw(c4845.94,2856.94) 4866,2856.94 cw(c4886.06,2856.94) v1@4871.88,2871.12 ; v1@4866,2885.31 ccw(c4866,2905.38) 4880.19,2891.19 ccw(c4894.38,2877) v1@4874.31,2877
  Bottom Layer w7: v1@4866,2868.69 cw(c4866,2848.62) 4880.19,2862.81 cw(c4894.38,2877) v1@4874.31,2877 ; v1(4866,2877) 4936,2807 5196,2807 5349,2654 6146,2654 J6.8@6208,2592 ; J6.8@6183.94,2592 ccw(c6125.86,2592) 6166.93,2633.07 ccw(c6208,2674.14) J6.8@6208,2616.06 ; J6.8@6190.94,2592 ccw(c6149.76,2592) 6178.88,2621.12 ccw(c6208,2650.24) J6.8@6208,2609.06
UC-SDA: J6.6 LCD2.1 LCD2.2 U3.34 | length 4002.6
  Top Layer w7: LCD2.2@3644.04,2155.82 3560.53,2155.82 3549,2144.3 3549,2128.3 3559,2118.3 3642.19,2118.3 LCD2.1@3644.04,2116.45 3824.45,2116.45 3888,2180 3888,2577 3989,2678 4912,2678 4945.97,2711.97 v1(4945.97,2877) 4965.9,2896.93 U3.34@4965.9,3070.55 ; v1@4940.09,2871.12 cw(c4925.91,2856.94) 4945.97,2856.94 cw(c4966.04,2856.94) v1@4951.85,2871.12 ; v1@4945.97,2885.31 ccw(c4945.97,2905.38) 4960.16,2891.19 ccw(c4974.35,2877) v1@4954.28,2877
  Bottom Layer w7: v1@4945.97,2868.69 cw(c4945.97,2848.62) 4960.16,2862.81 cw(c4974.35,2877) v1@4954.28,2877 ; v1(4945.97,2877) 4987.97,2835 5207.6,2835 5360.6,2682 6098,2682 J6.6@6208,2792 ; J6.6@6183.94,2792 cw(c6125.86,2792) 6166.93,2750.93 cw(c6208,2709.86) J6.6@6208,2767.94 ; J6.6@6190.94,2792 cw(c6149.76,2792) 6178.88,2762.88 cw(c6208,2733.76) J6.6@6208,2774.94
USART1-RXD: J6.2 U3.39 | length 2008.2
  Top Layer w7: U3.39@5056.45,3161.1 5098.1,3161.1 5222,3037.2 v1(5222,2991) ; v1@5216.12,2996.88 ccw(c5201.94,3011.06) 5222,3011.06 ccw(c5242.06,3011.06) v1@5227.88,2996.88
  Bottom Layer w7: v1@5216.12,2985.12 cw(c5201.94,2970.94) 5222,2970.94 cw(c5242.06,2970.94) v1@5227.88,2985.12 ; v1@5220.5,2988.5 5220,2989 v1(5222,2991) ; v1@5224,2992 5223,2992 v1(5222,2991) ; J6.2@6183.94,3192 cw(c6125.86,3192) 6166.93,3150.93 cw(c6208,3109.86) J6.2@6208,3167.94 ; J6.2@6190.94,3192 cw(c6149.76,3192) 6178.88,3162.88 cw(c6208,3133.76) J6.2@6208,3174.94 ; J6.2@6208,3192 6100,3084 6100,2763.2 6074.8,2738 5383.79,2738 5222,2899.79 v1(5222,2991)
USART1-TXD: J6.1 U3.40 | length 2090
  Top Layer w7: U3.40@5056.45,3180.79 5098.21,3180.79 5262,3017 v1(5262,2991) ; v1@5256.12,2996.88 ccw(c5241.94,3011.06) 5262,3011.06 ccw(c5282.06,3011.06) v1@5267.88,2996.88
  Bottom Layer w7: v1@5256.12,2985.12 cw(c5241.94,2970.94) 5262,2970.94 cw(c5282.06,2970.94) v1@5267.88,2985.12 ; v1(5262,2991) 5262,2879.59 5389.59,2752 6069.01,2752 6086,2768.99 6086,3170 J6.1@6208,3292 ; v1@5262,2995 v1@5264,2993 ; J6.1@6183.94,3292 cw(c6125.86,3292) 6166.93,3250.93 cw(c6208,3209.86) J6.1@6208,3267.94 ; J6.1@6190.94,3292 cw(c6149.76,3292) 6178.88,3262.88 cw(c6208,3233.76) J6.1@6208,3274.94
VCAP: C13.1 U3.18 | length 144.5
  Top Layer w10: C13.1@4609.69,3199.68 4649.84,3239.84 U3.18@4737.55,3239.84
VCC: CP1.1 D1.2 R4.2 R6.2 U2.3 | length 951.9
  Top Layer w20: U2.3@3419.89,3383.45 3503.45,3383.45 3529.06,3409.06 3529.06,3635 ; 3529.06,3610.94 3529.06,3635 ; CP1.1@3529.06,3706.06 CP1.1@3529.06,3714.06 ; CP1.1@3551.06,3682 CP1.1@3529.06,3704 ; R6.2@3728.55,3682 3531.06,3682 CP1.1@3529.06,3680 ; D1.2@3748.23,3768.55 3699,3768.55 R4.2@3662,3768.55 3583.55,3768.55 CP1.1@3529.06,3714.06 ; D1.2@3748.55,3768.87 D1.2@3764,3784.32 ; 3529.06,3635 CP1.1@3529.06,3680 ; CP1.1@3529.06,3680 CP1.1@3529.06,3704 ; CP1.1@3529.06,3704 CP1.1@3529.06,3714.06
VUSB1: R4.1 USB1.1 | length 315.9
  Top Layer w15: USB1.1@3539.8,4055.45 3620.55,4055.45 3662,4014 3662,3930 R4.1@3662,3837.45
XT1: C18.1 U3.16 X2.2 | length 773.6
  Top Layer w7: C18.1@4260,3274.68 4261.31,3276 X2.2@4396,3276 4450,3330 4610,3330 4660.79,3279.21 U3.16@4737.55,3279.21 ; X2.2@4381.77,3261.77 ccw(c4347.42,3227.42) 4347.42,3276 ccw(c4347.42,3324.58) X2.2@4381.77,3290.23 ; X2.2@4386.72,3266.72 ccw(c4364.32,3244.32) 4364.32,3276 ccw(c4364.32,3307.68) X2.2@4386.72,3285.28 ; X2.2@4396,3289.12 ccw(c4396,3320.8) 4418.4,3298.4 ccw(c4440.8,3276) X2.2@4409.12,3276 ; X2.2@4396,3296.12 ccw(c4396,3344.7) 4430.35,3310.35 ccw(c4464.7,3276) X2.2@4416.12,3276
XT2: R9.1 U3.15 | length 305.2
  Top Layer w7: R9.1@4524,3415.68 4524,3366 4545,3345 4583,3345 4620,3345 4630,3335 ; 4640,3325 4630,3335 ; U3.15@4737.55,3298.9 4666.1,3298.9 4630,3335
pads on no net: BT1.0 LCD1.0 LCD2.0 SW1.0 SW2.0 SW4.0 USB1.2 USB1.3 USB1.4 USB1.G

## Polygon pours and split planes (outlines as drawn)
DGND on Top Layer "Top Overlay-No Net" (solid, remove dead copper, pour order 1000): 3191,4577 6490,4577 6490,1566 6489,1565 6488,1564 3189,1564
DGND on Bottom Layer "Top Overlay-No Net" (solid, remove dead copper, pour order 1001): 3190,1566 6490,1566 6491,1565 6490,1566 6490,4577 3190,4577 3189,4578

## Keep-outs
Keep-Out Layer:
  lines w7: 3190,4290 3190,4526 cw(c3241,4526) 3241,4577 6439,4577 cw(c6439,4526) 6490,4526 6490,4290 ; 3190,4292 ccw(c3241,4292) 3241,4241 ; 3239,4241 3257,4241 cw(c3257,4190) 3308,4190 3308,2092 cw(c3257,2092) 3257,2041 3241,2041 ccw(c3241,1990) 3190,1990 3190,1616 ccw(c3241,1616) 3241,1565 6439,1565 ccw(c6439,1616) 6490,1616 6490,1990 ccw(c6439,1990) 6439,2041 6423,2041 cw(c6423,2092) 6372,2092 6372,4190 cw(c6423,4190) 6423,4241 6441,4241 ; 6439,4241 ccw(c6439,4292) 6490,4292
  lines w39.37: 5599,2971 cw(c5790.76,3015.49) 5729.16,2828.52

## Other copper
Top Layer:
  rectangle net DVCC: 3563,3189 3826,3544
  rectangle net DGND: 4430,2075 4760,2215
Bottom Layer:
  rectangle net DGND: 4415,2075 4770,2328
  rectangle net DVCC: 3454,3186 3863,3615

## Silkscreen, mask and mechanical layers (free items; w line width, h text height)
Top Overlay:
  lines w7: 3396,3415 3396,3442 ; 3424,3415 3424,3442
  lines w19.68: 5578.9,2927.59 cw(c5790,3015) 5672.06,2819.31 ; 5637.37,2951.8 cw(c5790,3015) 5704.73,2873.51
  text "KS0108-12864" at 5792,4321 h40
  text "KEY1" at 3984,4258 h40
  text "KEY2" at 4543,4258 h40
  text "KEY3" at 5099,4258 h40
  text "P30" at 5944,4189 h30
  text "P17" at 6056,4189 h30
  text "LEDK" at 3851,4090 h30
  text "LEDA" at 3981,4090 h30
  text "RST" at 4179,4090 h30
  text "CS2" at 4282,4090 h30
  text "CS1" at 4381,4090 h30
  text "DB7" at 4476,4090 h30
  text "DB6" at 4572,4090 h30
  text "DB5" at 4673,4090 h30
  text "DB4" at 4777,4090 h30
  text "DB3" at 4877,4090 h30
  text "DB2" at 4982,4090 h30
  text "DB1" at 5086,4090 h30
  text "DB0" at 5176,4090 h30
  text "EN" at 5283,4090 h30
  text "RW" at 5378,4090 h30
  text "RS" at 5478,4090 h30
  text "VIN" at 5567,4090 h30
  text "VCC" at 5674,4090 h30
  text "GND" at 5785,4090 h30
  text "VO" at 4107,4089 h30
  text "P31" at 5944,4086.43 h30
  text "P16" at 6056,4086.43 h30
  text "P22" at 4180,4029 h30
  text "P21" at 4282.62,4029 h30
  text "P20" at 4378.23,4029 h30
  text "P37" at 4476.85,4029 h30
  text "P36" at 4574.46,4029 h30
  text "P35" at 4673.08,4029 h30
  text "P34" at 4774.69,4029 h30
  text "P33" at 4873.31,4029 h30
  text "P32" at 4981.92,4029 h30
  text "P31" at 5087.54,4029 h30
  text "P30" at 5176.15,4029 h30
  text "P25" at 5274.77,4029 h30
  text "P24" at 5373.38,4029 h30
  text "P23" at 5472,4029 h30
  text "P32" at 5944,3983.86 h30
  text "P15" at 6056,3983.86 h30
  text "P33" at 5944,3881.29 h30
  text "P14" at 6056,3881.29 h30
  text "P34" at 5944,3778.71 h30
  text "P13" at 6056,3778.71 h30
  text "RESET" at 4942,3741 h40
  text "P35" at 5944,3676.14 h30
  text "P12" at 6056,3676.14 h30
  text "5V" at 3855,3663 h40
  text "3V3" at 3853,3581 h40
  text "P36" at 5944,3573.57 h30
  text "P11" at 6056,3573.57 h30
  text "P37" at 5944,3471 h30
  text "P10" at 6056,3471 h30
  text "SWC" at 5318,3367 h32
  text "SWD" at 5435,3367 h32
  text "RST" at 5548,3367 h32
  text "VCC" at 5661,3367 h32
  text "GND" at 5772,3367 h32
  text "P00" at 5944,3293 h30
  text "P20" at 6056,3293 h30
  text "P01" at 5944,3251.5 h30
  text "P02" at 5944,3210 h30
  text "P21" at 6056,3190.29 h30
  text "+" at 5748,3112 h32
  text "-" at 5815,3110 h32
  text "P22" at 6056,3087.57 h30
  text "NUC029LAN-LQFP48" at 4110,3000 h40
  text "P23" at 6056,2984.86 h30
  text "GND" at 3328,2942 h40
  text "DVCC" at 3467,2942 h40
  text "P24" at 6056,2882.14 h30
  text "P03" at 5944,2783 h30
  text "P25" at 6056,2779.43 h30
  text "LEDK" at 4001,2751 h30
  text "P04" at 5944,2730 h30
  text "NTC*2" at 5710,2703 h40
  text "P05" at 5944,2677 h30
  text "P26" at 6056,2676.71 h30
  text "LEDA" at 4001,2672.62 h30
  text "P06" at 5944,2624 h30
  text "DVCC" at 4001,2594.25 h30
  text "P27" at 6056,2574 h30
  text "P07" at 5944,2571 h30
  text "P04" at 4128,2541 h30
  text "CS" at 4001,2515.88 h30
  text "RS" at 4001,2437.5 h30
  text "P03" at 4128,2437.5 h30
  text "P40" at 5944,2400 h30
  text "3V3" at 6056,2399 h30
  text "RST" at 4001,2359.12 h30
  text "P02" at 4128,2359.12 h30
  text "P41" at 5944,2295.25 h30
  text "3V3" at 6056,2295.25 h30
  text "SCL" at 4001,2280.75 h30
  text "P07" at 4128,2280.75 h30
  text "DGND" at 4001,2202.38 h30
  text "P42" at 5944,2190.5 h30
  text "GND" at 6056,2190.5 h30
  text "SDA" at 4001,2124 h30
  text "P05" at 4138,2124 h30
  text "P43" at 5944,2085.75 h30
  text "GND" at 6056,2085.75 h30
  text "P44" at 5944,1981 h30
  text "UC1698U-160160" at 3996,1964 h40
  text "P45" at 5996,1886 h30
  text "2019-NUC029LAN-LCD" at 4186.97,1874 h30
  text "2019.09.26 WQ ShangHai" at 4087,1813.5 h30
  text "P46" at 5996,1774 h30
  text "JLCJLCJLCJLC" at 4361.91,1733 h30
  text "P47" at 5996,1662 h30
Top Solder:
  rectangle: 4450,2095 4745,2195

## Text inside footprints (layer, text, board x,y; h text height)
LCD1: Top Overlay "1" at 5740,3960 h30; Top Overlay "20" at 4066,3963 h30
LCD2: Top Overlay "18" at 3573,2821 h30; Top Overlay "1" at 3582,2052 h30